# Altium PCB Copy of DAC_PCB_jan30.PcbDoc
Units mil, origin at the board's own origin, x right, y up, seen from the top; angles counter-clockwise.
Board outline 1700 x 2145 mil, 4 copper layers (Top Layer, VDD, GND, Bottom Layer), stack 23.756 mil thick; 27 components, 32 nets, 94 pads, 22 vias.
Unrouted connection lines stored in the file: 22.
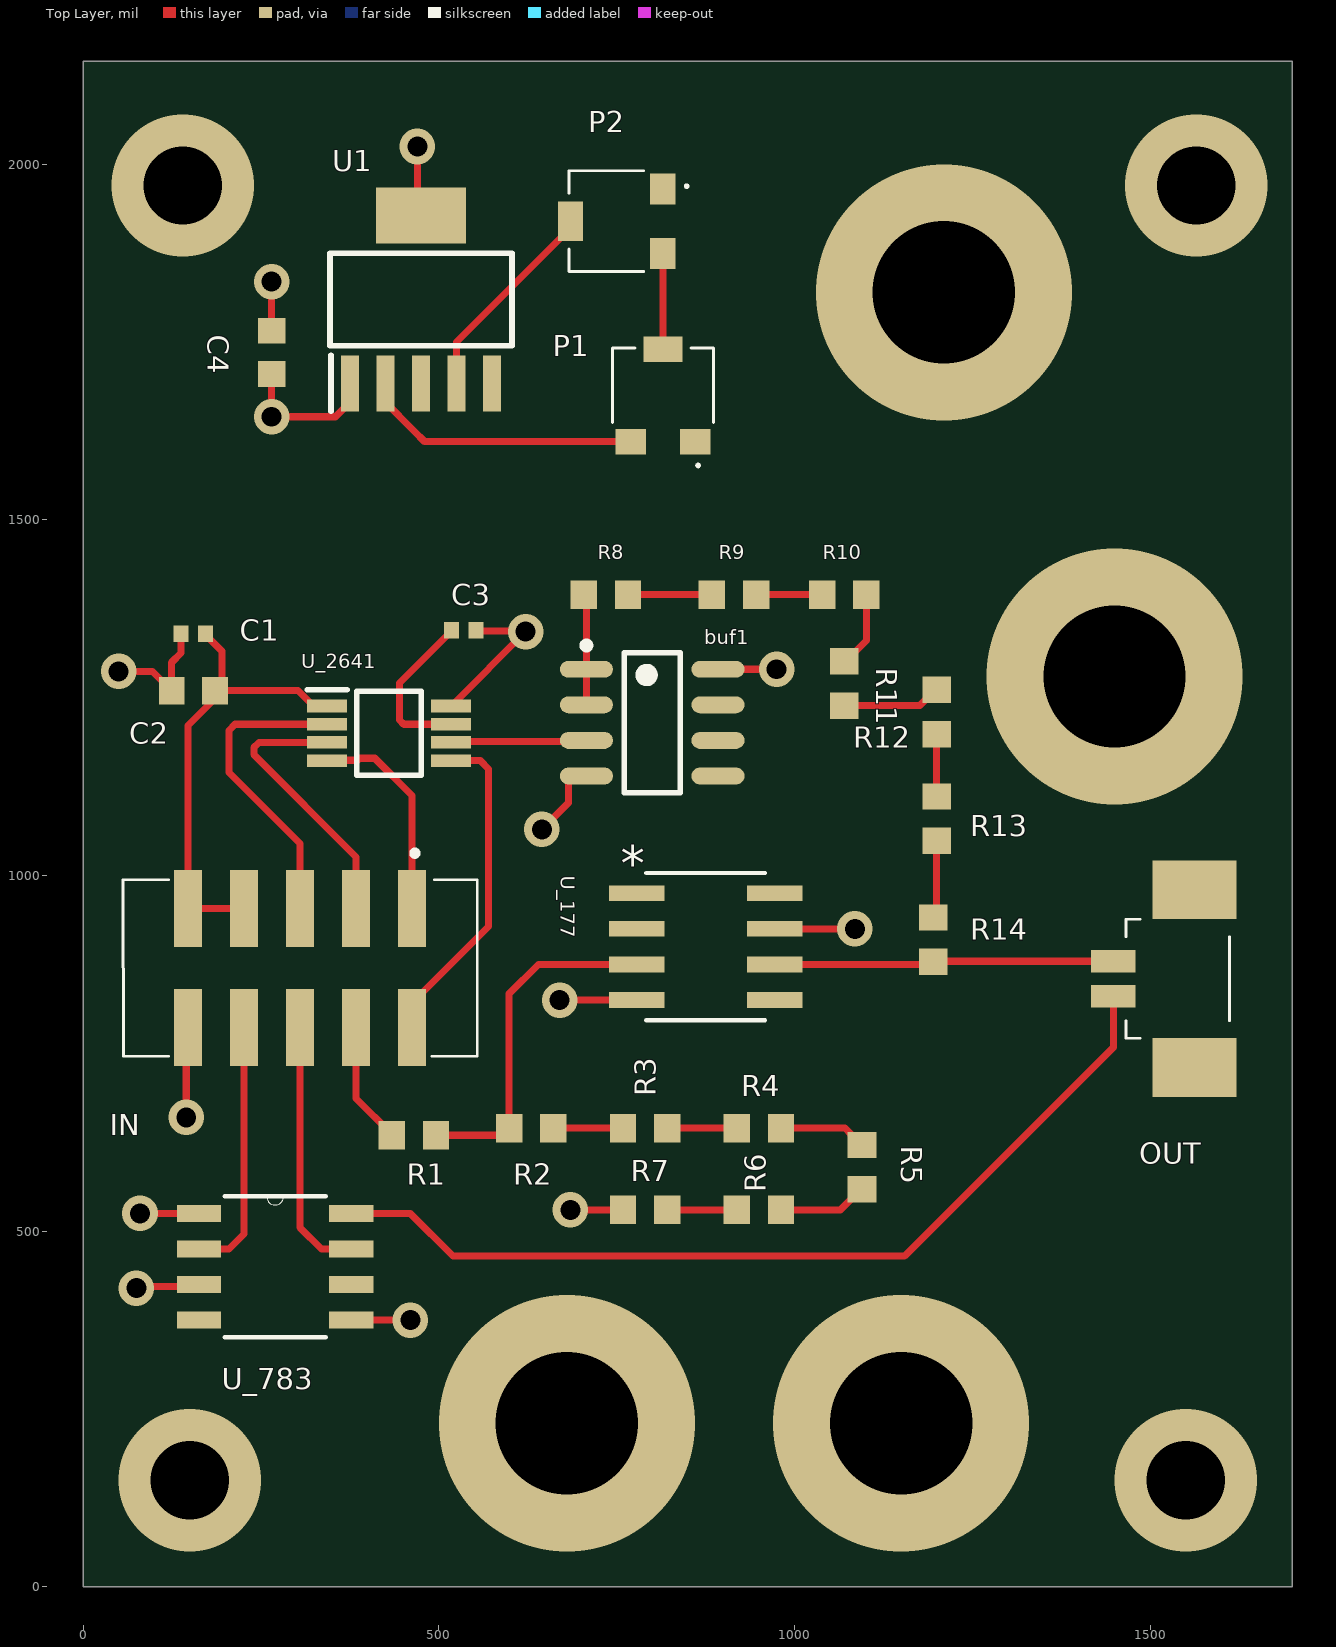
[diagram p0: Top Layer view]
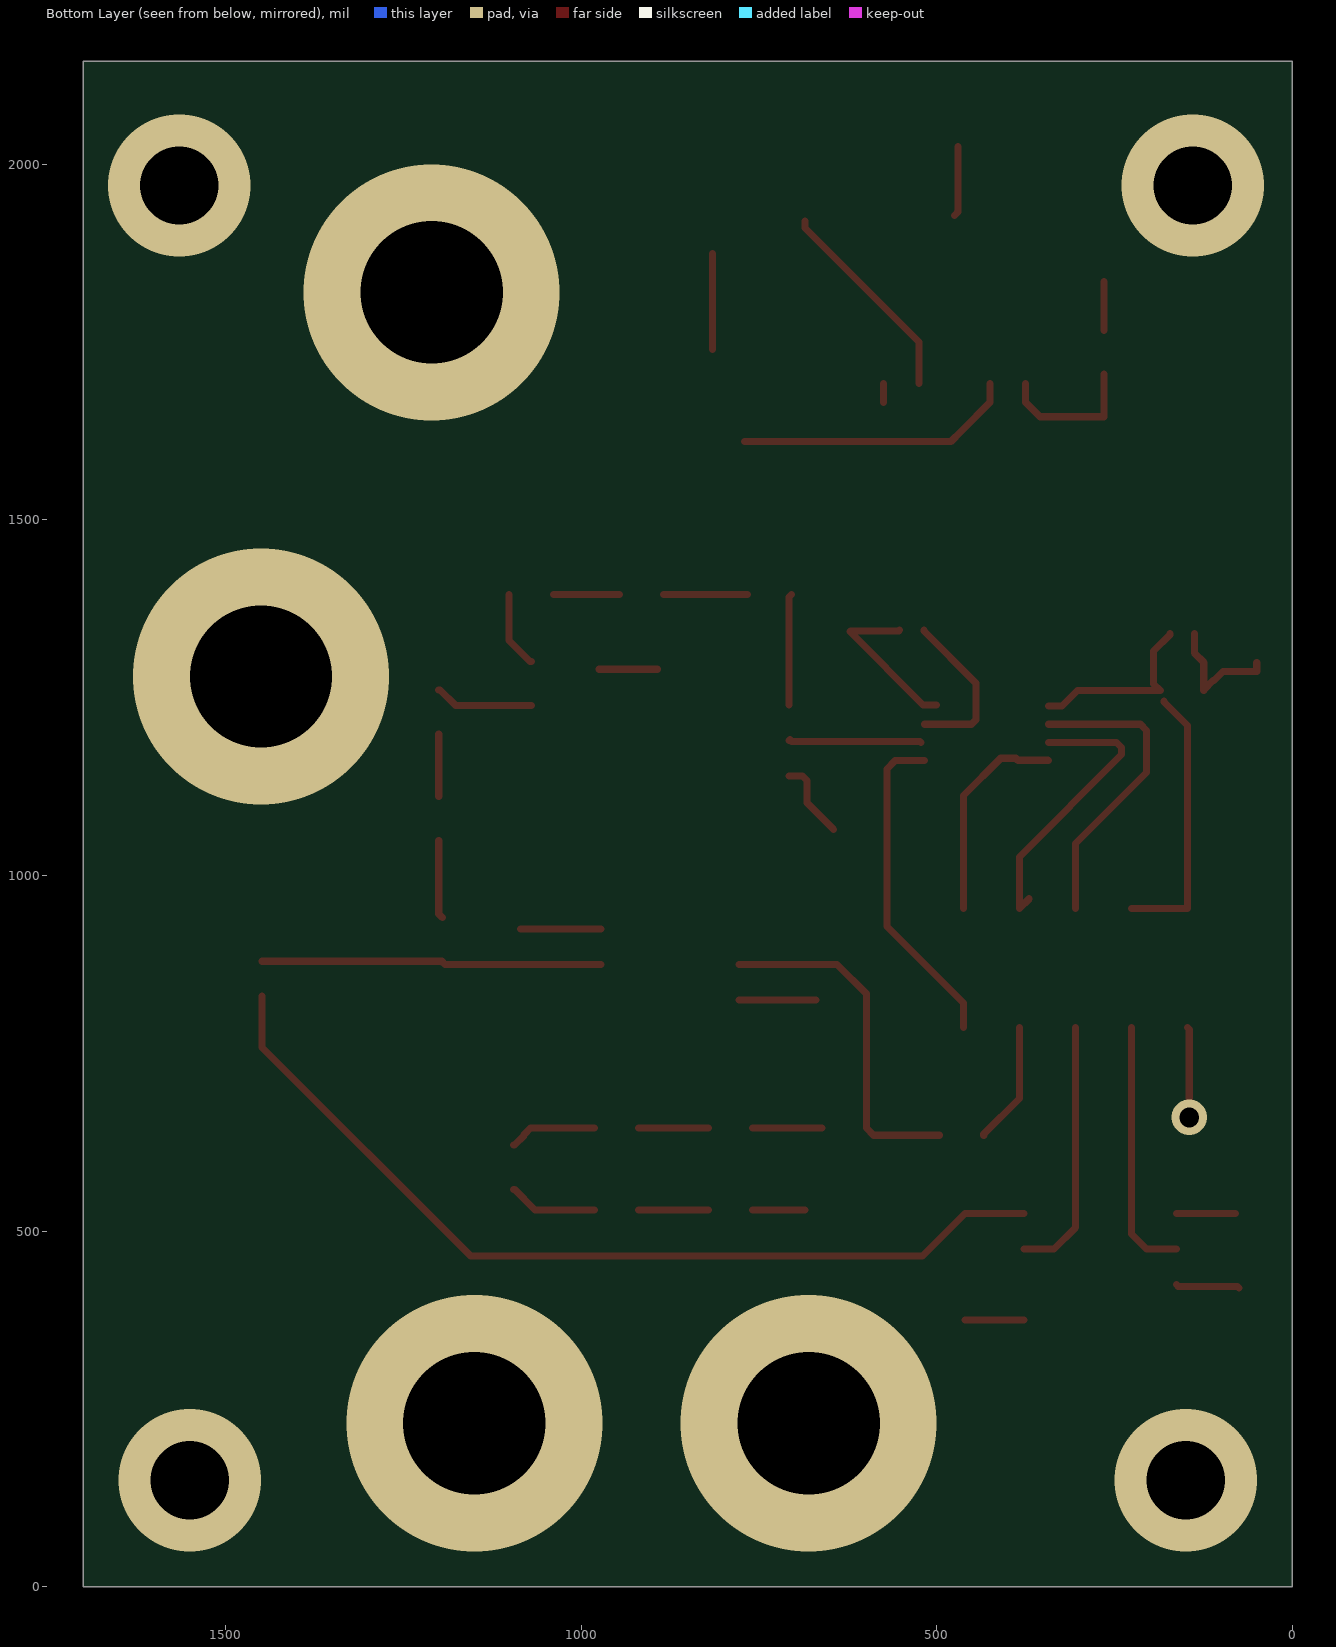
[diagram p1: Bottom Layer view, seen from below]

## Layer stack, top to bottom
Top Solder: solder mask 0.4, Solder Resist, Dk 3.5
Top Layer: signal copper 1.4
Dielectric 1: prepreg 2.8, PP-006, Dk 4.1
VDD: signal copper 1.378
Dielectric 2: prepreg 12.6, FR-4, Dk 4.8
GND: signal copper 1.378
Dielectric 3: prepreg 2.8, PP-006, Dk 4.1
Bottom Layer: signal copper 1.4
Bottom Solder: solder mask 0.4, Solder Resist, Dk 3.5

## Board outline
0,0 1700,0 1700,2145 0,2145

## Design rules (kind name [scope] priority, off if disabled: settings)
Clearance [All] p1: gap=10 ignorepadtopadclearanceinfootprint=TRUE except(0: Arc-Hole Track-Hole SMDPad-Hole THPad-Hole Via-Hole Fill-Hole Poly-Hole Region-Hole Text-Hole)
PolygonConnect [All] p1: connectstyle=Relief reliefconductorwidth=10 reliefentries=4 polygonreliefangle="90 Angle" airgapwidth=10
RoutingVias [All] p1: holewidth=28 width=50 viastyle="Through Hole" minholewidth=28 minwidth=50 maxholewidth=28 maxwidth=50
SolderMaskExpansion [All] p1: expansion=4 istentingtop=FALSE
Width [All] p1: maxlimit=10 minlimit=10 preferedwidth=10
30 further rules are at their usual default settings.

## Classes and differential pairs
component class DAC_Connectors: IN OUT
component class DAC&DifferenceAmp: buf1 C1 C2 C3 C4 P1 P2 R1 R2 R3 R4 R5 R6 R7 R8 R9 R10 R11 R12 R13 R14 U1 U_177 U_783

## Components (designator, comment, footprint, x,y, rotation, side; value= is the part's Value field where it differs from the comment)
buf1 "LT1678IS8#PBF" LT-S8-8_L 800,1215 r0 top
C1 "C1005X5R1C104K050BA" CAPC1005X55N 155,1340 r180 top
C2 "0603YD105KAT2A" CAPC1608X90N 155,1260 r180 top
C3 "C1005X5R1C104K050BA" CAPC1005X55N 535,1345 r180 top
C4 "0603YD105KAT2A" CAPC1608X90N 265,1735.51 r90 top
IN "151118-1010" 1511181010 305,870 r180 top
OUT "10114828-10102LF" 1011482810102LF 1530,855 r90 top
P1 "PVG3A104C01R00" PVG3A104C01R00 815.28,1674.96 r0 top
P2 "PVG3A104C01R00" PVG3A104C01R00 750,1920 r90 top
R1 "RG1608N-102-W-T1" RESC1608X50N 465,635 r0 top
R2 "RG1608N-513-W-T1" RESC1608X50N 630,645 r0 top
R3 "RG1608N-513-W-T1" RESC1608X50N 790,645 r0 top
R4 "RG1608N-513-W-T1" RESC1608X50N 950,645 r0 top
R5 "RG1608N-513-W-T1" RESC1608X50N 1095,590 r270 top
R6 "RG1608N-513-W-T1" RESC1608X50N 950,530 r180 top
R7 "RG1608N-102-W-T1" RESC1608X50N 790,530 r0 top
R8 "RG1608N-102-W-T1" RESC1608X50N 735,1395 r0 top
R9 "RG1608N-513-W-T1" RESC1608X50N 915,1395 r0 top
R10 "RG1608N-513-W-T1" RESC1608X50N 1070,1395 r0 top
R11 "RG1608N-513-W-T1" RESC1608X50N 1070,1270 r270 top
R12 "RG1608N-513-W-T1" RESC1608X50N 1200,1230 r270 top
R13 "RG1608N-513-W-T1" RESC1608X50N 1200,1080 r270 top
R14 "RG1608N-102-W-T1" RESC1608X50N 1195,910 r270 top
U1 "TPS73225DCQR" SOT127P706X180-6N 475,1810 r90 top
U_177 "OP177GSZ" R_8_ADI 875,900 r0 top
U_783 "AD783JRZ" SOIC127P600X272-8N 270,450 r0 top
U_2641 "LTC2641CMS8-16#PBF" SOP65P490X110-8N 430,1200 r0 top

## Footprints (in the part's own frame and the unit in brackets; to place one, negate y for a bottom-side part, rotate by r counter-clockwise, add the part's x,y. Pads: shape width x height; smd on the part's side, far side on the other; paste and mask are expansions set on the pad)
1511181010 [mm]
  rect 1x2.75 smd: 1(-4,-2.125) 2(-4,2.125) 3(-2,-2.125) 4(-2,2.125) 5(0,-2.125) 6(0,2.125) 7(2,-2.125) 8(2,2.125) 9(4,-2.125) 10(4,2.125)
  silkscreen extent -6.32,-4.2 6.32,3.15, body extent -6.32,-3.4 6.32,3.4, height 9.35
1011482810102LF [mm]
  rect 0.8x1.6 smd: 1(-0.625,2.075) 2(0.625,2.075)
  rect 2.1x3 smd: 3(-3.175,-0.825) 4(3.175,-0.825)
  silkscreen extent -2.12,-2.07 2.12,1.63, body extent -4.02,-2.11 4.02,2.8, height 4.8
CAPC1005X55N [mm]
  rect 0.53x0.6 smd: 1(-0.437,0) 2(0.437,0)
CAPC1608X90N [mm]
  rect 0.92x0.98 smd: 1(-0.775,0) 2(0.775,0)
LT-S8-8_L [mm] "SOIC, 8-Leads, Body 4.9x3.9mm, Pitch 1.27mm, IPC High Density"
  oval 1.9x0.6 smd: 1(-2.35,1.905) 2(-2.35,0.635) 3(-2.35,-0.635) 4(-2.35,-1.905) 5(2.35,-1.905) 6(2.35,-0.635) 7(2.35,0.635) 8(2.35,1.905)
  silkscreen extent -2.47,-2.5 1,2.88, body extent -2,-2.5 2,2.5, height 1.76
PVG3A104C01R00 [mm]
  rect 1.1x0.9 smd: 1(1.15,-1.65) 3(-1.15,-1.65)
  rect 1.4x0.9 smd: 2(0,1.65)
  silkscreen extent -1.8,-2.55 1.8,1.7, body extent -1.8,-2.01 1.8,2.01, height 2.1
R_8_ADI [mil]
  rect 78x22 smd paste+0 mask+0: 1(-97,75) 2(-97,25) 3(-97,-25) 4(-97,-75) 5(97,-75) 6(97,-25) 7(97,25) 8(97,75)
  silkscreen extent -84,-104 84,104, body extent -129,-143 129,143, height 71
RESC1608X50N [mm]
  rect 0.94x1.02 smd: 1(-0.79,0) 2(0.79,0)
SOIC127P600X272-8N [mil]
  rect 62x24 smd: 1(-107,75) 2(-107,25) 3(-107,-25) 4(-107,-75) 5(107,-75) 6(107,-25) 7(107,25) 8(107,75)
  silkscreen extent -71,-99 71,99, body extent -96,-118 96,118, height 30
SOP65P490X110-8N [mm]
  rect 1.425x0.45 smd: 1(-2.212,0.975) 2(-2.212,0.325) 3(-2.212,-0.325) 4(-2.212,-0.975) 5(2.212,-0.975) 6(2.212,-0.325) 7(2.212,0.325) 8(2.212,0.975)
  silkscreen extent -2.93,-1.5 1.15,1.55, body extent -2.45,-1.5 2.45,1.5, height 1.1
SOT127P706X180-6N [mm]
  rect 2x0.65 smd: 1(-3,2.54) 2(-3,1.27) 3(-3,0) 4(-3,-1.27) 5(-3,-2.54)
  rect 2x3.2 smd: 6(3,0)
  silkscreen extent -4,-3.25 1.65,3.25, body extent -3.53,-3.25 3.53,3.25, height 1.8

## Part data
buf1: library part CMP-0359-03474-2, "Dual Channel, Very Low 1/f Corner Frequency Precision Operational Amplifier, 20 MHz Typical GBW, 6 V/us Typical SR, 3 to 36 V, 8-Pin SOIC (S8-8), Industrial, Pb-Free", Linear Technology Part Number=LT1678, Manufacturer="Linear Technology", Channels (#)=2, ComponentLink1Description="Manufacturer URL", ComponentLink1URL=http://www.linear.com/, ComponentLink2Description=Datasheet, ComponentLink2URL=http://cds.linear.com/docs/en/datasheet/16789fs.pdf, ComponentLink3Description="Package Specification", ComponentLink3URL=http://cds.linear.com/docs/en/packaging/05081610_G_SO8.pdf, GBW (MHz) Typical=20, Is (mA) Typical=2, Mounting Technology="Surface Mount", PackageDescription="8-Pin Plastic Small Outline, Body 4.9 x 3.9 mm, Pitch 1.27 mm", PackageReference=LT-S8-8, PackageVersion="Rev G", PartNumber=LT1678IS8#PBF, RevisionNote="URLs updated", RoHS=Pb-Free, SR (V/us) Typical=6, Type=VFB, Vos (mV) Guaranteed=0.1, Vos (mV) Typical=0.035, Vs Max (V)=36, Vs Min (V)=3
C1 C3: "CERAMIC CAPACITOR, 0.1UF, 16V, X5R, 10%, 0402", Package=None, Availability=Unavailable, MP=C1005X5R1C104K050BA, Price=None
C2 C4: "1ÂµF Â±10% 16V Ceramic Capacitor X5R 0603 (1608 Metric)", Package="1608 AVX", Availability=Unavailable, DigiKey-Purchase-URL=https://snapeda.com/shop?store=DigiKey&id=270397, MF=AVX, MP=0603YD105KAT2A, Price=None, SnapEDA_Link=https://www.snapeda.com/parts/0603YD105KAT2A/AVX%20/%20Kyocera/view-part/270397/?ref=snap
IN: "Connector", Manufacturer_Name=Molex, Datasheet Link=https://www.molex.com/pdm_docs/sd/1511181010_sd.pdf, Height=9.25mm, Manufacturer_Part_Number=151118-1010
OUT: "Connector", Manufacturer_Name=Amphenol, Mouser2 Part Number=649-10114828-10102, Datasheet Link=https://componentsearchengine.com//10114828-10102LF.pdf, Height=4.7mm, Manufacturer_Part_Number=10114828-10102LF, Mouser2 Price/Stock=https://www.mouser.com/Search/Refine.aspx?Keyword=649-10114828-10102
P1 P2: "Variable Resistor", Manufacturer_Name=Bourns, Mouser2 Part Number=81-PVG3A104C01R00, Datasheet Link=https://componentsearchengine.com//PVG3A104C01R00.pdf, Height=2mm, Manufacturer_Part_Number=PVG3A104C01R00, Mouser2 Price/Stock=https://www.mouser.com/Search/Refine.aspx?Keyword=81-PVG3A104C01R00
R1 R7 R8 R14: "RES SMD 1K OHM 0.05% 1/10W 0603", Package=None, Availability=Unavailable, MP=RG1608N-102-W-T1, Price=None
R2 R3 R4 R5 R6 R9 R10 R11 R12 R13: Package=None, Availability=Unavailable, MP=RG1608N-513-W-T1, Price=None
U1: "Integrated Circuit", Manufacturer_Name="Texas Instruments", Datasheet Link=http://www.ti.com/lit/gpn/tps732, Height=1.8mm, Manufacturer_Part_Number=TPS73225DCQR
U_177: "No Description Available", Built_By=EMA_UL_Team, Copyright="Copyright (C) 2021 Accelerated Designs. All rights reserved", Manufacturer_Part_Number=OP177GSZ, RefDes=RefDes, SourceLibrary=Analog_2012-01-01_9, Type=DEV, Vendor="Analog Devices Inc"
U_783: "Sample and Hold Amplifier 1 Circuit 8-SOIC", Package="SOIC-8 Analog Devices", Availability=Bad, Check_prices=https://www.snapeda.com/parts/AD783JRZ/Analog%20Devices%20Inc./view-part/353069/?ref=eda, MF="Analog Devices", MP=AD783JRZ, Price=None, Purchase-URL=https://pricing.snapeda.com/search/part/AD783JRZ/?ref=eda, SnapEDA_Link=https://www.snapeda.com/parts/AD783JRZ/Analog%20Devices%20Inc./view-part/353069/?ref=snap
U_2641: "Integrated Circuit", Manufacturer_Name="Analog Devices", Mouser Part Number=584-C2641CMS8-16PBF, Arrow Part Number=LTC2641CMS8-16#PBF, Arrow Price/Stock=https://www.arrow.com/en/products/ltc2641cms8-16pbf/analog-devices, Datasheet Link=https://www.analog.com/media/en/technical-documentation/data-sheets/26412fd.pdf, Height=1.1mm, Manufacturer_Part_Number=LTC2641CMS8-16#PBF, Mouser Price/Stock=https://www.mouser.com/Search/Refine.aspx?Keyword=584-C2641CMS8-16PBF

## Via types
v1: diameter 50, hole 28, Top Layer to VDD, 7 vias
v2: diameter 50, hole 28, Top Layer to GND, 6 vias
v3: diameter 360, hole 200, Top Layer to Bottom Layer, 4 vias
v4: diameter 200, hole 110, Top Layer to Bottom Layer, 4 vias
v5: diameter 50, hole 28, Top Layer to Bottom Layer, 1 vias

## Nets (pads, with @x,y where several pads share a name; then routed paths per layer and width w, separated by ;. In a path a pad name is that pad's centre, name@x,y a point inside that pad or via, vN(x,y) a via of type N, cw(c..) or ccw(c..) an arc to the next point about the centre after c; other vN are vias at no path point)
+VDD: buf1.8 C4.1 U1.1 U1.5 U_177.7 U_783.1 | length 510
  Top Layer w10: v1(80,525) U_783.1 ; C4.1 v1(265,1645) 354.69,1645 375,1665.32 U1.1 ; U1.5@575,1665.32 U1.5 ; buf1.8 v1(975,1290) ; U_177.7 v1(1085,925)
  other v3: 1210,1820
-VDD: buf1.4 U_177.4 U_783.5 | length 302.9
  Top Layer w10: U_783.5 v1(460,375) ; v1(645,1065) 682.37,1102.37 682.37,1133.71 688.66,1140 buf1.4 ; v1(670,825) U_177.4
  other v3: 680,230
AGND: C1.2 C2.2 C3.1 C4.2 IN.10 OUT.3 OUT.4 P1.1 P2.1 U1.3 U1.6 U_783.3 U_2641.8 | length 803.6
  Top Layer w10: v2@50,1299.18 v2(50,1287.09) 97.4,1287.09 110.2,1274.29 111.38,1274.29 C2.2@124.49,1261.18 ; v2(75,420) 77.5,422.5 160.5,422.5 U_783.3 ; C2.2 C2.2@124.49,1261.18 ; C1.2 137.8,1313.11 124.49,1299.8 C2.2@124.49,1261.18 ; v5(145,660) 145,783.82 IN.10 ; C4.2 v2(265,1835) ; v2(470,2025) 470,1933.11 U1.6 ; U_2641.8@500,1240 519.11,1240 v2(622.05,1342.95) 621.03,1343.97 553.23,1343.97 C3.1
  other v3: 1450,1280
AGND: R7.1 | length 73.9
  Top Layer w10: v2(685,530) R7.1
  other v3: 1150,230
DAC_CLR: IN.2 U_2641.5 | length 465.9
  Top Layer w10: IN.2 462.48,820.79 570,928.31 570,1150 558.39,1161.61 U_2641.5
DACCS: IN.5 U_2641.2 | length 433.4
  Top Layer w10: IN.5 305,1045 205,1145 205,1204.14 213.65,1212.8 U_2641.2
DACSCLK: IN.3 U_2641.3 | length 411.2
  Top Layer w10: U_2641.3 247.2,1187.2 240,1180 240,1170 383.74,1026.26 IN.3 IN.3@370,967.4
DACVDD: C3.2 P1.3 U1.2 U_2641.7 | length 625.7
  Top Layer w10: U1.2 425,1665.32 465.16,1625.16 ; 465,1625 465.16,1625.16 ; U_2641.7 450.86,1212.8 445,1218.65 445,1270.83 517.8,1343.62 C3.2 ; P1.3 480.31,1610 465.16,1625.16
daout: buf1.3 U_2641.6 | length 187.5
  Top Layer w10: U_2641.6@522.09,1187.2 523.48,1188.6 703.88,1188.6 706.38,1191.1 buf1.3
diffin: buf1.1 buf1.2 R8.1 | length 156.5
  Top Layer w10: R8.1 707.48,1391.42 buf1.1 buf1.2
NetC1_1: C1.1 C2.1 IN.7 IN.9 U_2641.1 | length 643.5
  Top Layer w10: C1.1 172.2,1338.62 195,1315.83 195,1269.49 C2.1 302.11,1260 323.72,1238.39 U_2641.1 ; C2.1@180.51,1245 180.51,1243.82 147.52,1210.83 IN.9 IN.7
NetIN_1: IN.1 U_2641.4 | length 301.6
  Top Layer w10: U_2641.4 343.45,1162.16 385.96,1162.16 388.81,1165 410,1165 462.48,1112.52 IN.1
NetIN_4: IN.4 R1.1 | length 172.1
  Top Layer w10: IN.4 383.74,686.73 433.9,636.57 R1.1
NetIN_8: IN.8 U_783.2 | length 362.1
  Top Layer w10: U_783.2 205,475 226.26,496.26 IN.8
NetOUT_1: OUT.1 U_783.8 | length 1289.7
  Top Layer w10: U_783.8 460,525 520,465 1155,465 1448.31,758.31 OUT.1
NetOUT_2: OUT.2 R14.2 U_177.6 | length 478.2
  Top Layer w10: U_177.6 1191.1,875 R14.2 1195.71,879.61 OUT.2
NetP1_2: P1.2 P2.3 | length 134.9
  Top Layer w10: P2.3 815.28,1874.41 P1.2
NetP2_2: P2.2 U1.4 | length 294.4
  Top Layer w10: U1.4 525,1750.12 685.04,1910.16 P2.2
NetR1_2: R1.2 R2.1 U_177.3 | length 492
  Top Layer w10: R1.2 588.9,635 R2.1 598.9,833.9 640,875 U_177.3
NetR2_2: R2.2 R3.1 | length 97.8
  Top Layer w10: R2.2 R3.1
NetR3_2: R3.2 R4.1 | length 97.8
  Top Layer w10: R3.2 R4.1
NetR4_2: R4.2 R5.1 | length 124.7
  Top Layer w10: R4.2 1071.1,645 1079.92,636.18 1079.92,634.61 1093.43,621.1 R5.1
NetR5_2: R5.2 R6.1 | length 125.9
  Top Layer w10: R6.1 1064.53,530 1093.43,558.9 R5.2
NetR6_2: R6.2 R7.2 | length 97.8
  Top Layer w10: R7.2 R6.2
NetR8_1: 
NetR8_2: R8.2 R9.1 U_177.2 | length 117.8
  Top Layer w10: R8.2 R9.1
NetR9_2: R9.2 R10.1 | length 92.8
  Top Layer w10: R9.2 R10.1
NetR10_2: R10.2 R11.1 | length 107.7
  Top Layer w10: R11.1 1071.57,1301.1 1101.1,1330.63 R10.2
NetR11_2: R11.2 R12.1 | length 139.2
  Top Layer w10: R11.2 1176.22,1238.9 1198.43,1261.1 R12.1
NetR12_2: R12.2 R13.1 | length 87.8
  Top Layer w10: R13.1 R12.2
NetR13_2: R13.2 R14.1 | length 109.9
  Top Layer w10: R14.1 1200,946.1 R13.2
"S&H Control": IN.6 U_783.7 | length 365.8
  Top Layer w10: IN.6 305,505 335,475 U_783.7
pads on no net: buf1.5 buf1.6 buf1.7 U_177.1 U_177.5 U_177.8 U_783.4 U_783.6
copper on no net:
  other v4: 150,150 1550,150 140,1970 1565,1970

## Text inside footprints (layer, text, board x,y; h text height)
U_177: Top Overlay "*" at 755.5,992 h50; Mechanical 7 "Default Padstyle: RX78Y22D0T" at 525,601.5 h50; Mechanical 7 "Pin One Padstyle: RX78Y22D0T" at 525,541.5 h50; Mechanical 7 "Alt 1 Padstyle: OX60Y90D30P" at 537.5,361.5 h50; Mechanical 7 "Alt 2 Padstyle: OX90Y60D30P" at 537.5,301.5 h50; Mechanical 7 "0.157in/3.988mm" at 781.25,1093.5 h25; Mechanical 7 "0.244in/6.198mm" at 781.25,1168.5 h25; Mechanical 7 "0.197in/5.004mm" at 1073.5,887.5 h25; Mechanical 7 "0.05in/1.27mm" at 495.5,937.5 h25; Mechanical 7 "0.05in/1.27mm" at 696.75,681.5 h25; Mechanical 13 "*" at 799,945.5 h50